# Altium PCB TESTER_SENSOR_HAL_AT24xx.PcbDoc
Units mm, origin at the board's own origin, x right, y up, seen from the top; angles counter-clockwise.
Board outline 104.78 x 105.66 mm, 2 copper layers (Top Layer, Bottom Layer); 66 components, 47 nets, 256 pads, 24 vias.
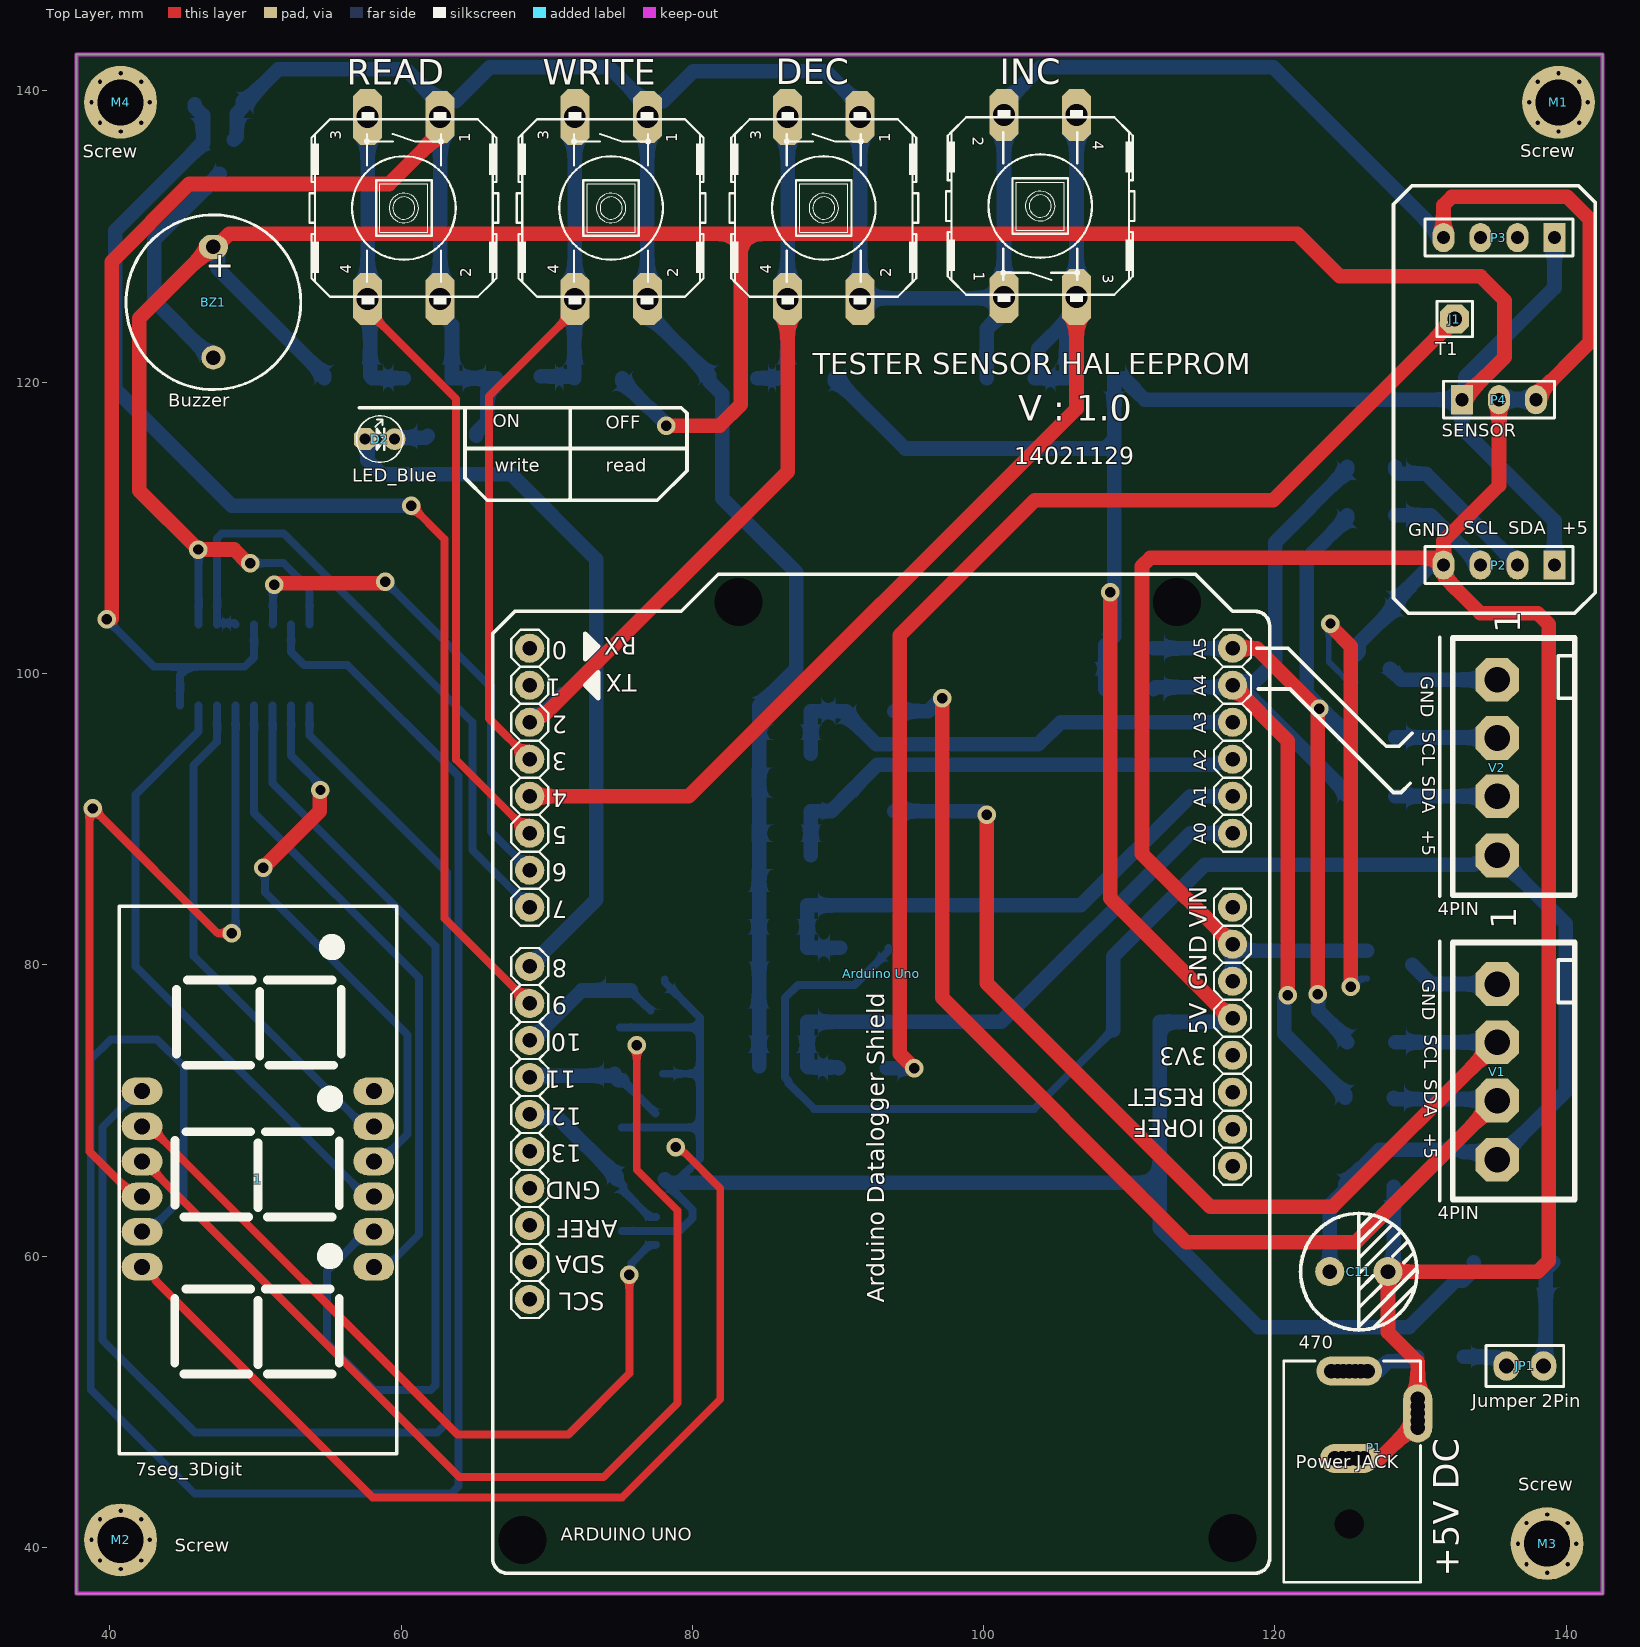
[diagram p0: Top Layer view]
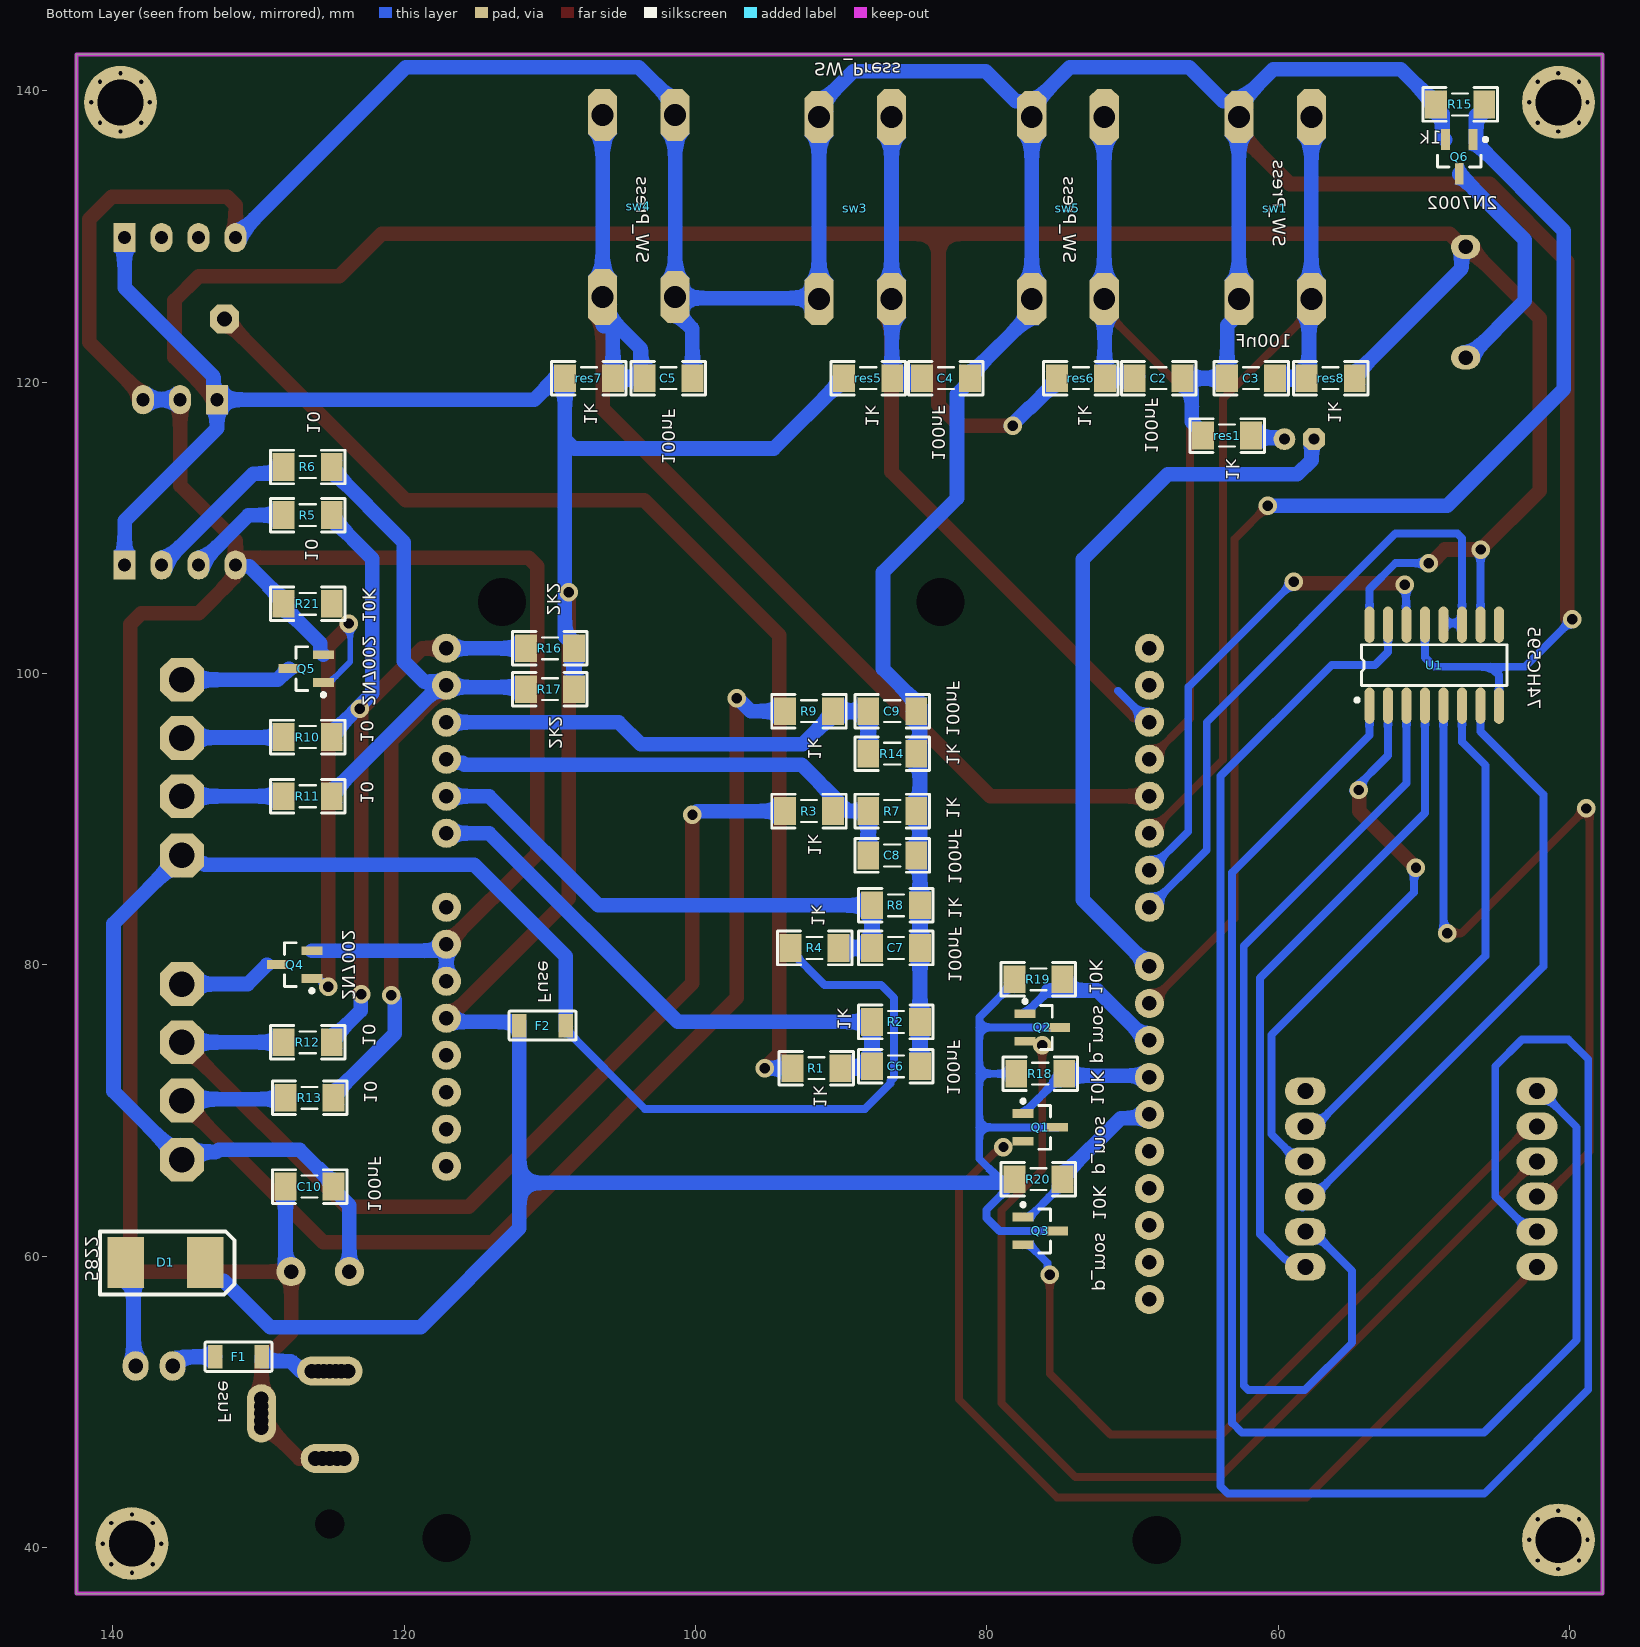
[diagram p1: Bottom Layer view, seen from below]
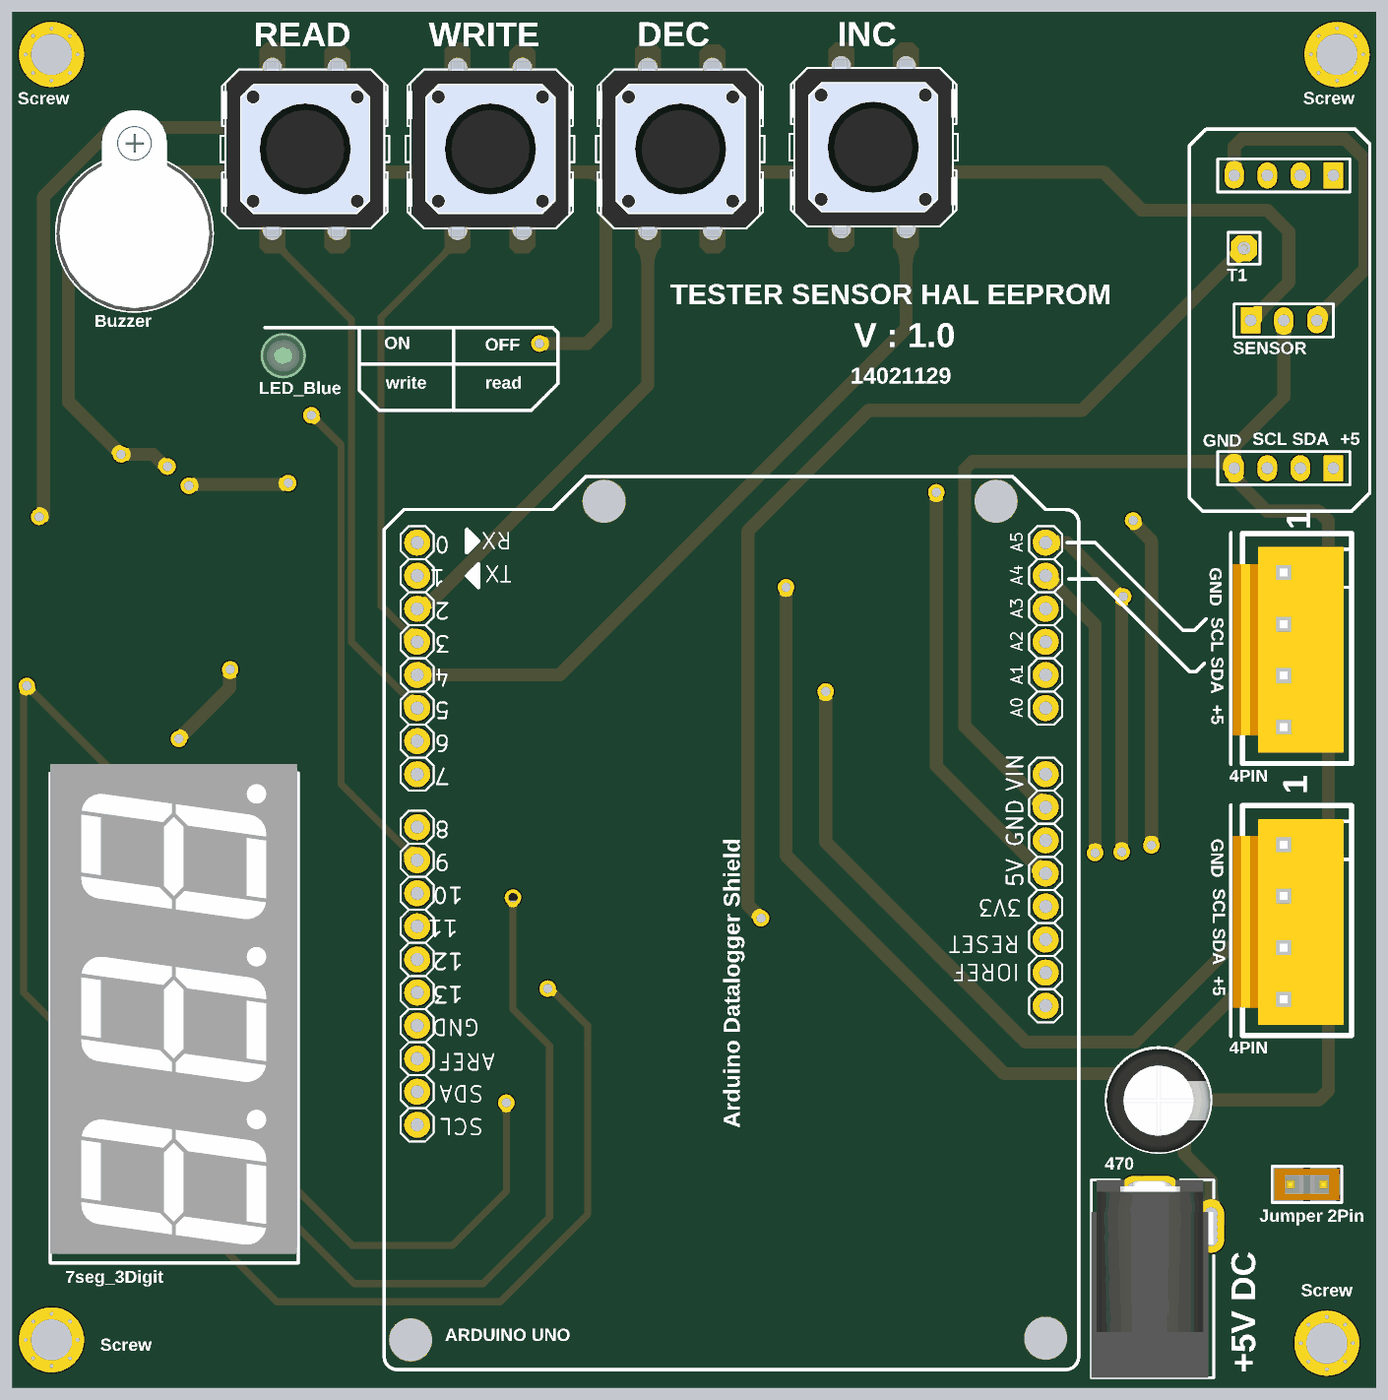
[diagram p2: 3D render of the assembled board from above, using the file's embedded part models]
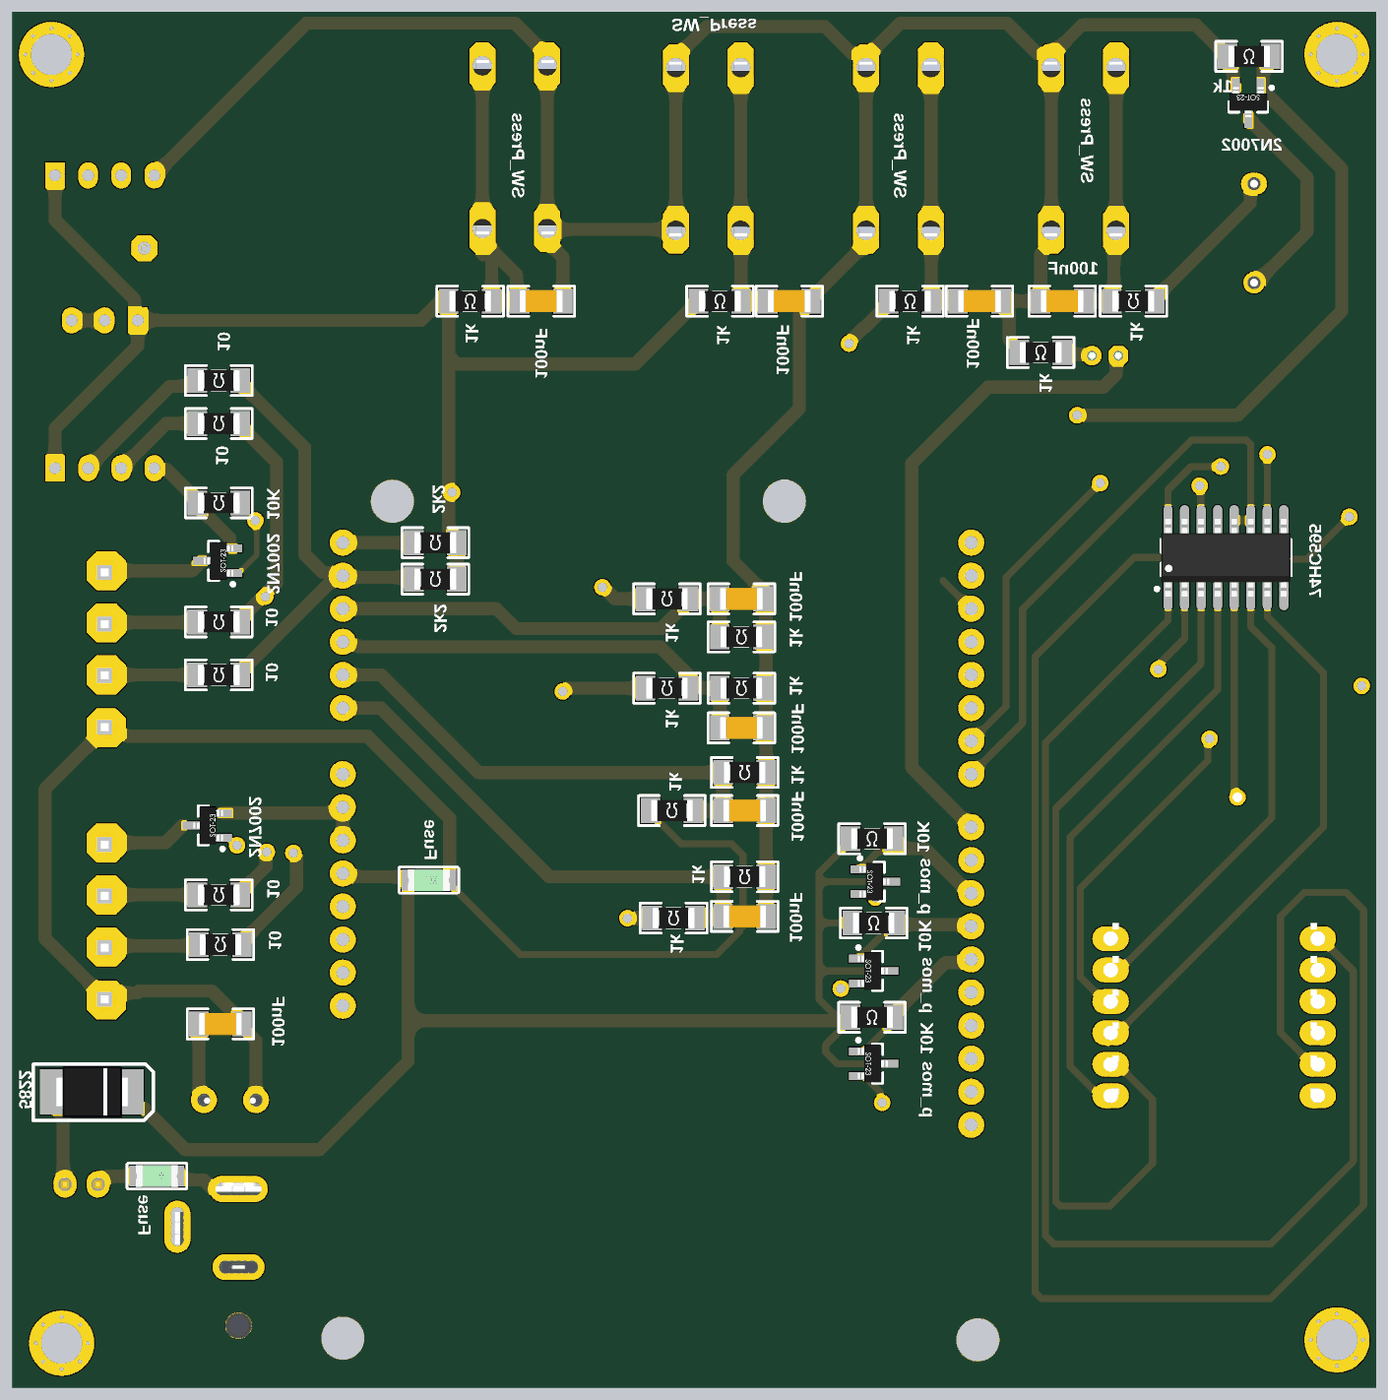
[diagram p3: 3D render of the assembled board from below, using the file's embedded part models]

## Layer stack, top to bottom
Top Solder: solder mask 0.0102, Solder Resist, Dk 3.5
Top Layer: signal copper 0.0356
Dielectric 1: dielectric 0.32, FR-4, Dk 4.8
Bottom Layer: signal copper 0.0356
Bottom Solder: solder mask 0.0102, Solder Resist, Dk 3.5

## Board outline
37.719,36.83 37.719,142.494 142.494,142.494 142.494,36.83

## Design rules (kind name [scope] priority, off if disabled: settings)
Clearance [All] p1: gap=0.254 ignorepadtopadclearanceinfootprint=FALSE except(0: Arc-Hole Track-Hole SMDPad-Hole THPad-Hole Via-Hole Fill-Hole Poly-Hole Region-Hole Text-Hole)
PolygonConnect [All] p1: connectstyle=Relief reliefconductorwidth=0.254 reliefentries=4 polygonreliefangle="90 Angle" airgapwidth=0.254
RoutingVias [All] p1: holewidth=0.711 width=1.27 viastyle="Through Hole" minholewidth=0.711 minwidth=1.27 maxholewidth=0.711 maxwidth=1.27
SolderMaskExpansion [All] p1: expansion=0.102 istentingtop=FALSE
Width [All] p1: maxlimit=2 minlimit=0.254 preferedwidth=0.54 minimp=50.000000 maximp=50.000000 favimp=50.000000
30 further rules are at their usual default settings.

## Components (designator, comment, footprint, x,y, rotation, side; value= is the part's Value field where it differs from the comment)
1 "7seg_3Digit" 7Segment 50.165,65.532 r90 top locked value="Anode Common"
"Arduino Uno" "ARDUINO UNO" "ARDUINO UNO" 93.094,74.287 r90 top locked
BZ1 "Buzzer" "Buzzer 3M" 47.117,125.486 r0 top value="5V 14V Current 30mA) ; RADIAL 12x10 mm"
C2 "100nF" CAP1206 68.199,120.269 r180 bottom value=100nf
C3 "100nF" CAP1206 61.849,120.269 r0 bottom value=100nf
C4 "100nF" CAP1206 82.804,120.269 r180 bottom value=100nf
C5 "100nF" CAP1206 101.854,120.269 r180 bottom value=100nf
C6 "100nF" CAP1206 86.233,73.025 r0 bottom value=100nf
C7 "100nF" CAP1206 86.233,81.153 r0 bottom value=100nf
C8 "100nF" CAP1206 86.487,87.503 r0 bottom value=100nf
C9 "100nF" CAP1206 86.487,97.409 r0 bottom value=100nf
C10 "100nF" CAP1206 126.492,64.77 r180 bottom value=100nf
C11 "470" CAP_POLAR_8X11.5 125.762,58.928 r0 top value=470UF/16V
D1 "5822" SMA_Diode 136.398,59.563 r0 bottom
D2 "LED_Blue" LED-3mm 58.547,116.083 r0 top
F1 "Fuse" "Fuse 1206 smd" 131.369,53.086 r90 bottom value="1A, 72V"
F2 "Fuse" "Fuse 1206 smd" 110.49,75.819 r90 bottom value="1A, 72V"
J1 "T1" PIN1 132.334,124.333 r0 top locked
JP1 "Jumper 2Pin" "Jumper Small - 2.54 - RED" 137.16,52.451 r180 top
M1 "Screw" "Board Screw_No Silk" 139.468,139.209 r0 top
M2 "Screw" "Board Screw_No Silk" 40.75,40.513 r0 top
M3 "Screw" "Board Screw_No Silk" 138.684,40.259 r0 top
M4 "Screw" "Board Screw_No Silk" 40.75,139.209 r0 top
P1 "Power JACK" "power jack" 125.103,37.601 r90 top
P2 "Header 4" HDR1X4 139.192,107.442 r180 top locked
P3 "Header 4" HDR1X4 139.192,129.921 r180 top locked
P4 "SENSOR" HDR1X3 132.842,118.793 r0 top locked
Q1 "p_mos" SOT23_BEC_M 76.327,68.834 r180 bottom
Q2 "p_mos" SOT23_BEC_M 76.2,75.692 r180 bottom
Q3 "p_mos" SOT23_BEC_M 76.327,61.722 r180 bottom
Q4 "2N7002" SOT23_BEC_M 127.508,80.01 r0 bottom
Q5 "2N7002" SOT23_BEC_M 126.714,100.33 r0 bottom
Q6 "2N7002" SOT23_BEC_M 47.559,135.477 r270 bottom
R1 "1k" RES1206 91.694,72.898 r0 bottom
R2 "1k" RES1206 86.233,76.073 r0 bottom
R3 "1k" RES1206 92.202,90.551 r0 bottom
R4 "1k" RES1206 91.821,81.153 r0 bottom
R5 "10" RES1206 126.619,110.871 r0 bottom value=1k
R6 "10" RES1206 126.619,114.173 r0 bottom value=1k
R7 "1k" RES1206 86.487,90.551 r0 bottom
R8 "1k" RES1206 86.233,84.074 r0 bottom
R9 "1k" RES1206 92.202,97.409 r0 bottom
R10 "10" RES1206 126.619,95.631 r0 bottom value=1k
R11 "10" RES1206 126.619,91.567 r0 bottom value=1k
R12 "10" RES1206 126.619,74.676 r0 bottom value=1k
R13 "10" RES1206 126.492,70.866 r0 bottom value=1k
R14 "1k" RES1206 86.487,94.488 r0 bottom
R15 "1k" RES1206 47.498,139.065 r180 bottom
R16 "2k2" RES1206 109.989,101.718 r0 bottom value=1k
R17 "2k2" RES1206 109.989,98.924 r0 bottom value=1k
R18 "10K" RES1206 76.327,72.517 r180 bottom value=1k
R19 "10K" RES1206 76.454,78.994 r180 bottom value=1k
R20 "10K" RES1206 76.454,65.278 r180 bottom value=1k
R21 "10K" RES1206 126.619,104.775 r0 bottom value=1k
res1 "1k" RES1206 63.5,116.332 r180 bottom
res5 "1k" RES1206 88.138,120.269 r180 bottom
res6 "1k" RES1206 73.533,120.269 r180 bottom
res7 "1k" RES1206 107.315,120.269 r180 bottom
res8 "1k" RES1206 56.388,120.269 r0 bottom
sw1 "SW_Press" tact_kfc-12x12 60.198,131.953 r270 bottom
sw3 "SW_Press" tact_kfc-12x12 89.027,131.953 r270 bottom
sw4 "SW_Press" tact_kfc-12x12 103.886,132.087 r90 bottom
sw5 "SW_Press" tact_kfc-12x12 74.422,131.953 r270 bottom
U1 "74HC595" SO16_N 49.276,100.571 r90 bottom value="max 6 V min 2 V ,8bit"
V1 "4PIN" 4PIN 135.255,78.676 r90 top value=Connector
V2 "4PIN" 4PIN 135.255,99.567 r90 top value=Connector

## Footprints (in the part's own frame and the unit in brackets; to place one, negate y for a bottom-side part, rotate by r counter-clockwise, add the part's x,y. Pads: shape width x height; smd on the part's side, far side on the other; paste and mask are expansions set on the pad)
4PIN [mil]
  oct 118x118 hole 69: 1(0,0) 2(-157.48,0) 3(-314.96,0) 4(-474.96,0)
  silkscreen extent -585,-210 115,155, body extent -550,-186 72,148, height 429
7Segment [mm]
  oval 1.9x2.8 hole 1.1: 1(-6.276,-7.965) 2(-3.863,-7.965) 3(-1.45,-7.965) 4(0.963,-7.965) 5(3.376,-7.965) 6(5.789,-7.965) 7(5.789,7.945) 8(3.376,7.945) 9(0.963,7.945) 10(-1.45,7.945) 11(-3.863,7.945) 12(-6.276,7.945)
  silkscreen extent -19.1,-9.54 18.49,9.51, body extent -18.42,-9.48 19.18,9.53, height 8.3
"ARDUINO UNO" [mm]
  round 2 hole 1: 0(27.44,24.26) 1(24.9,24.26) 2(22.36,24.26) 3(19.82,24.26) 3.3V(-0.5,-24) 4(17.28,24.26) 5(14.74,24.26) 5V(2.04,-24) 6(12.2,24.26) 7(9.66,24.26) 8(5.596,24.26) 9(3.056,24.26) 10(0.516,24.26) 11(-2.024,24.26) 12(-4.564,24.26) 13(-7.104,24.26) A0(14.74,-24) A1(17.28,-24) A2(19.82,-24) A3(22.36,-24) A4(24.9,-24) A5(27.44,-24) AREF(-12.184,24.26) GND1(7.12,-24) GND2(4.58,-24) GND3(-9.644,24.26) IOREF(-5.58,-24) NC(-8.12,-24) RST(-3.04,-24) SCL(-17.264,24.26) SDA(-14.724,24.26) Vin(9.66,-24)
  silkscreen extent -36.06,-26.54 32.52,26.8
"Board Screw_No Silk" [mm]
  round 0.6 hole 0.3: S(-2,0) S(-1.414,-1.414) S(-1.414,1.414) S(0,-2) S(0,2) S(1.414,-1.414) S(1.414,1.414) S(2,0)
  round 5 hole 3.15 mask+0.1: S(0,0)
"Buzzer 3M" [mm]
  oval 2x1.65 hole 1 mask+0.102: 1(0,3.8)
  round 1.65 / inner oval 2x1.65 / far side oval 2x1.65 hole 1 mask+0.102: 2(0,-3.8)
  silkscreen extent -6,-6 6,6, body extent -6,-6 6,9.45, height 9.65
CAP1206 [mm]
  rect 1.5x1.9 smd: 1(-1.651,0) 2(1.651,0)
  Top Layer pour cut-out: 1.136,1.515 1.136,-1.533 -1.15,-1.533 -1.15,1.515
  silkscreen extent -2.56,-1.15 2.56,1.15, body extent -1.65,-0.85 1.65,0.85, height 0.94
CAP_POLAR_8X11.5 [mm]
  round 2 hole 1 mask+0.102: 1(-2,0) 2(2,0)
  silkscreen extent -4,-4 4,4, body extent -4,-4.05 4,3.95, height 11.5
"Fuse 1206 smd" [mm]
  rect 1.6x1 smd: 1(0,-1.6) 2(0,1.6)
  silkscreen extent -1,-2.3 1,2.3, body extent -0.83,-1.6 0.83,1.6, height 0.56
HDR1X3 [mm] "Connector; Header; 3 Position"
  rect 1.5x2 hole 0.9: 1(0,0)
  oval 1.5x2 hole 0.9: 2(2.54,0) 3(5.08,0)
  silkscreen extent -1.27,-1.27 6.35,1.27
HDR1X4 [mm] "Connector; Header; 4 Position"
  rect 1.5x2 hole 0.9: 1(0,0)
  oval 1.5x2 hole 0.9: 2(2.54,0) 3(5.08,0) 4(7.62,0)
  silkscreen extent -1.27,-1.27 8.89,1.27
"Jumper Small - 2.54 - RED" [mil] "Designer Abbas Basereh"
  oval 70x80 hole 40: 1(-50,0) 2(50,0)
  silkscreen extent -105,-55 105,55, body extent -100,-50 100,50, height 337
LED-3mm [mm]
  oct 1.5x1.5 hole 0.762 mask+0.102: 1(-1.016,0)
  round 1.5 hole 0.762 mask+0.102: 2(1.016,0)
  silkscreen extent -1.6,-1.6 1.6,1.6, body extent -1.75,-1.75 1.75,1.75, height 3.9
PIN1 [mm] "Connector; Plug"
  oct 2x2 hole 1: 1(0,0)
  silkscreen extent -1.22,-1.22 1.22,1.22
"power jack" [mm] "Power Adaptor Jack"
  round 1.5 hole 1: 1(14.5,-1.25) 1(14.5,-0.8) 1(14.5,-0.4) 1(14.5,0.4) 1(14.5,0.8) 1(14.5,1.25) 2(8.5,-1) 2(8.5,1) 2(8.5,-0.5) 2(8.5,0.5) 3(10.6,-4.7) 3(11.1,-4.7) 3(12.1,-4.7) 3(12.6,-4.7)
  oval 2x4.5 hole 1: 1(14.5,0)
  oval 2x4 hole 1: 2(8.5,0)
  oval 4x2 hole 1: 3(11.6,-4.7)
  round 1.9 hole 2: MH(4,0)
  silkscreen extent 0,-4.9 15.2,4.5, body extent 0,-4.9 15.2,4.5, height 11
RES1206 [mm]
  rect 1.5x1.9 smd: 1(-1.651,0) 2(1.651,0)
  Top Layer pour cut-out: 1.136,1.515 1.136,-1.533 -1.15,-1.533 -1.15,1.515
  silkscreen extent -2.56,-1.15 2.56,1.15, body extent -1.6,-0.8 1.6,0.8, height 0.62
SMA_Diode [mm]
  rect 2.5x3.5 smd: 1(2.7,0) 2(-2.75,0)
  silkscreen extent -4.75,-2.12 4.47,2.2, body extent -2.85,-1.95 2.74,1.99, height 2.44
SO16_N [mm] "16-Pin Small Outline Integrated Circuit 1.27 mm Pitch, IPC Medium Density - DESIGNER ABBAS BASEREH"
  oval 2.5x0.7 smd: 1(-2.781,4.445) 2(-2.781,3.175) 3(-2.781,1.905) 4(-2.781,0.635) 5(-2.781,-0.635) 6(-2.781,-1.905) 7(-2.781,-3.175) 8(-2.781,-4.445) 9(2.781,-4.445) 10(2.781,-3.175) 11(2.781,-1.905) 12(2.781,-0.635) 13(2.781,0.635) 14(2.781,1.905) 15(2.781,3.175) 16(2.781,4.445)
  silkscreen extent -2.52,-5 1.4,5.42, body extent -3,-4.97 3,4.96, height 1.62
SOT23_BEC_M [mm] "SOT23, 3-Leads, Body 2.9x1.3mm, Pitch 0.95mm, Lead Span 2.4mm, IPC Low Density"
  rect 1.45x0.6 smd: 1(-1.175,0.95) 2(-1.175,-0.95) 3(1.175,0)
  silkscreen extent -1.3,-1.5 0.7,1.92, body extent -1.23,-1.45 1.07,1.45, height 1
tact_kfc-12x12 [mm]
  oct 3.582x2 hole 1.5 mask+0.102: 1(-6.248,-2.489) 1(6.248,-2.489) 2(6.248,2.489)
  oct 3.85x2 hole 1.5 mask+0.102: 2(-6.248,2.489)
  body extent -6.72,-6.03 6.73,5.97, height 17.7

## Part data
1: library part 7Segment-3Digit, "7Segment-3 Digit- Anode Common", manufacture=China, manufacture p-n=7Segment, Footprint Patch=R_C_D_T.PcbLib, LIBRARY PATCH=R_C_D_T.SchLib, part=7Segment-3Digit, Rahkaran=1012400449, supplier1=javan, supplier1 p-n=7Segment-3Digit
BZ1: library part "BUZZER 5V", case=Cylindrical, manufacture="BUZZER 12A05", power=CHINA, Footprint Patch=NKH_Contacts.PcbLib, LIBRARY PATCH=NKH_Contacts.SchLib, manufacture p-n="BUZZER 12A05", part="BUZZER 5V", Rahkaran=1011600143, supplier1=javan, supplier1 p-n="BUZZER 12A05"
C2 C3 C4 C5 C6 C7 C8 C9 C10: library part Cap-smd-1206-100nf, "cap_no_polar_seramic_multilayer", case=1206, manufacture="Chaozhou Three-circle (Group) Co", manufacture p-n=TCC1206X7R104K500DT, Footprint Patch=R_C_D_T.PcbLib, LIBRARY PATCH=R_C_D_T.SchLib, part=Cap-smd-1206-100nf, Rahkaran=1010600301, supplier1=javan, supplier1 p-n="100NF (1206) 50V 10% X7R"
C11: library part Cap-pol-dip-470uf_16V, "Cap electrolitic radial", manufacture="Jiaweicheng Elctronic Co", manufacture p-n=KM471M1CBKJ0812VBK, designer=rashid_behdarvand, Footprint Patch=R_C_D_T.PcbLib, LIBRARY PATCH=R_C_D_T.SchLib, part=Cap-pol-dip-470uf_16V, Rahkaran=‎1010600330, supplier1=javan, supplier1 p-n=470UF/16V-8X12-105C-BLACK
D1: library part Diode-shotkey-SMB5822, manufacture=Toshiba, manufacture p-n="1N5822 SMD SS34", Footprint Patch=R_C_D_T.PcbLib, LIBRARY PATCH=R_C_D_T.SchLib, part=Diode-shotkey-SMB5822, Rahkaran=‎1010700945, supplier1=kalaelec, supplier1 p-n="1N5822 SMD SS34"
D2: library part LED3MM_RED, "LED LIGHTING 5mm Blue", manufacture=China, manufacture p-n="LED 3mm", Data=16-12-2016, designer="Abbas Basereh", Footprint Patch=R_C_D_T.PcbLib, LIBRARY PATCH=R_C_D_T.SchLib, part=LED3MM_RED, Rahkaran=‎1010000820, supplier1=javan, supplier1 p-n="LED 3mm R"
F1 F2: library part "Fuse 1206 smd", case=1206, manufacture="Reomax Electronics", manufacture p-n=12.100.1, Footprint Patch=R_C_D_T.PcbLib, LIBRARY PATCH=R_C_D_T.SchLib, part="Fuse 1206 smd", Rahkaran=1011500951, supplier1=javan, supplier1 p-n="FUSE 1A SMD (1206) ONE TIME"
J1: library part Socket, "Socket", Footprint Patch=NKH_Contacts.PcbLib, LatestRevisionDate=17-Jul-2002, LatestRevisionNote="Re-released for DXP Platform.", LIBRARY PATCH=NKH_Contacts.SchLib, part=Socket, Publisher="Altium Limited", supplier1=javan
JP1: "Jumper, 2-Pin", Data=16-12-2016, designer="Abbas Basereh", Footprint Patch=NKH_Contacts.PcbLib, manufacture p-n="Jumper 2Pin", part="Jumper 2Pin", supplier1 p-n="Jumper 2Pin"
M1 M2 M3 M4: library part "Board Screw", "Board Screw With Spacer"
P1: library part "dc jack adaptor", case=9*11*13, manufacture p-n=CHINA, Footprint Patch=NKH_Contacts.PcbLib, LIBRARY PATCH=NKH_Contacts.SchLib, part="dc jack adaptor", Rahkaran=1011100270, supplier1=javan, supplier1 p-n="DC PLUG 5.5MM PCB"
P2 P3: "Header, 4-Pin", LatestRevisionDate=17-Jul-2002, LatestRevisionNote="Re-released for DXP Platform.", Publisher="Altium Limited"
P4: library part "Header 3", "Header, 3-Pin", LatestRevisionDate=17-Jul-2002, LatestRevisionNote="Re-released for DXP Platform.", Publisher="Altium Limited"
Q1 Q2 Q3: library part Mosfet-p-channel-AO3401, "P CHANNEL MOSFET", Current - Continuous Drain (Id) @ 25° C=4.2A, Input Capacitance (Ciss) @ Vds="727pF @ 20V", manufacture="Alpha & Omega Semiconductor", manufacture p-n=AO3401A, Manufacturer="Diodes Inc", Package / Case=SOT-23, Supplier Part Number=DMP2305UDITR-ND, Category="Discrete Semiconductor Products", datasheet link=a03401_data_sheet, Footprint Patch=R_C_D_T.PcbLib, LIBRARY PATCH=R_C_D_T.SchLib, Mounting Type="Surface Mount", part=Mosfet-p-channel-AO3401, Rahkaran=‎1010300772, supplier1=javan, supplier1 p-n=AO3401A, Supplier 1=Digi-Key, Supplier Part Number 1=DMP2305UDITR-ND
Q4 Q5 Q6: library part Mosfet-n-channel-2n7002, manufacture="Toshiba Corporation", manufacture p-n=T2N7002AK,LM, Footprint Patch=R_C_D_T.PcbLib, LIBRARY PATCH=R_C_D_T.SchLib, part=Mosfet-n-channel-2n7002, Rahkaran=‎1010301739, supplier1=javan, supplier1 p-n=2N7002A
R1 R2 R3 R4 R5 R6 R7 R8 R9 R10 R11 R12 R13 R14 R15 R16 R17 R18 R19 R20 R21 res1 res5 res6 res7 res8: library part resistor-smd-1206-1k, case=1206, manufacture="ANHUI VICO TECHNOLOGIES CO.", manufacture p-n="1K (1206) 1%", designer=rashid_behdarvand, Footprint Patch=R_C_D_T.PcbLib, LIBRARY PATCH=R_C_D_T.SchLib, part=resistor-smd-1206-1k, Rahkaran=1012000595, supplier1=javan, supplier1 p-n="1K (1206) 1%"
sw1 sw3 sw4 sw5: library part "tac switch kfc-12x12x12", "small tac switch", case=kfc-12x12, manufacture p-n=CHINA, Footprint Patch=NKH_Contacts.PcbLib, LIBRARY PATCH=NKH_Contacts.SchLib, part="tac switch kfc-12x12x12", Rahkaran=1011800267, supplier1=javan, supplier1 p-n=KFC-12X12X12
U1: library part "74HC595 SMD", "8 Bit Shift Register with Output Latches (3 STATE)", case=SO-16, manufacture="Nexperia USA Inc", manufacture p-n=74HC595D, Code_IPC=SOIC127P600-16, ComponentLink1Description="Manufacturer Link", ComponentLink1URL=http://www.st.com/, ComponentLink2Description=Datasheet, ComponentLink2URL=http://www.st.com/stonline/products/literature/ds/1989/m74hc595.pdf, DatasheetVersion=Apr-1993, Footprint Patch=NKH_IC.PcbLib, LatestRevisionDate=13-Apr-2006, LatestRevisionNote="IPC-7351 Footprint Added.", LIBRARY PATCH=NKH_IC.SchLib, PackageDescription="16-Pin Small Outline Integrated Circuit 1.27 mm Pitch", PackageReference=SO16, PackageVersion=May-1998, part="74HC595 SMD", Published=8-Jun-2000, Publisher="Altium Limited", Rahkaran=‎1012300064, supplier1=javan, supplier1 p-n=74HC595D
V1 V2: library part VH_ST_4pin, "connector power 4pin stright lock", Footprint Patch=NKH_Contacts.PcbLib, LIBRARY PATCH=NKH_Contacts.SchLib, part=VH_ST_4pin, Rahkaran=1011100529

## Free pads (board coordinates)
  round 1.524 hole 3.3: 9(113.284,104.902) 10(83.185,104.902) 11(68.326,40.513) 12(117.094,40.64)

## Via types
v1: diameter 1.27, hole 0.711, Top Layer to Bottom Layer, 23 vias
v2: diameter 0.8, hole 0.5, Top Layer to Bottom Layer, tented both sides, 1 vias

## Nets (pads, with @x,y where several pads share a name; then routed paths per layer and width w, separated by ;. In a path a pad name is that pad's centre, name@x,y a point inside that pad or via, vN(x,y) a via of type N, cw(c..) or ccw(c..) an arc to the next point about the centre after c; other vN are vias at no path point)
+5: "Arduino Uno.5V" BZ1.1 D1.2 F2.2 P2.1 P3.1 P4.1 Q1.3 Q2.3 Q3.3 R16.1 R17.1 R18.1 R19.1 R20.1 res5.1 res6.1 res7.1 res8.1 U1.10 U1.16 | length 419.1
  Top Layer w0.54: v1@46.319,108.367 v1@46.319,108.402 ; BZ1.1@46.942,129.286 BZ1.1 ; v1@49.488,107.569 v1(49.657,107.569) ; P3.1 P3.1@139.192,130.171
  Top Layer w1: v1(46.087,108.506) 42.037,112.556 42.037,124.381 BZ1.1@46.942,129.286 ; v1@46.424,108.506 48.551,108.506 v1@49.488,107.569 ; BZ1.1 47.314,129.286 48.203,130.175 83.312,130.175 ; v1(78.218,117.015) 81.867,117.015 83.312,118.461 83.312,130.175 ; v1(108.698,105.585) 108.698,84.571 116.941,76.327 117.094,76.327 ; P4.1 132.842,119.043 133.092,119.292 133.342,119.292 135.763,121.714 135.763,125.603 134.112,127.254 124.46,127.254 121.539,130.175 83.312,130.175
  Bottom Layer w0.54: U1.10 v1@46.101,108.077 ; v1(49.657,107.569) 51.943,107.569 53.721,105.791 U1.16 ; Q2.3 80.518,75.692 ; Q3.3 79.121,61.722 80.01,62.611 80.01,63.173 78.105,65.078 R20.1@78.105,65.274 ; Q1.3 80.518,68.834 ; R18.1 80.518,72.517 ; R19.1 78.105,78.794 80.518,76.381 80.518,75.692 ; 78.867,65.024 80.518,66.675 80.518,68.834 ; 112.065,68.834 112.09,68.86 ; 80.518,68.834 80.518,72.517 ; 80.518,72.517 80.518,75.692
  Bottom Layer w1: BZ1.1 47.416,128.987 47.416,127.79 54.737,120.469 res8.1 ; res6.1 75.184,120.069 77.016,118.237 77.089,118.237 v1@78.359,116.967 ; R20.1 78.105,65.274 78.355,65.024 78.867,65.024 112.09,65.024 ; res5.1 89.789,120.069 90.039,119.819 90.239,119.819 94.615,115.443 108.331,115.443 108.966,116.078 ; R17.1 R16.1 108.338,101.918 108.966,102.546 108.966,116.078 ; res7.1 108.966,116.078 ; res7.1@109.601,120.269 111.078,118.793 P4.1 ; 117.094,76.327 116.845,76.078 112.09,76.078 F2.2 112.09,68.86 112.09,65.024 ; D1.2 133.648,59.063 132.898,58.313 132.398,58.313 129.203,55.118 118.872,55.118 112.09,61.9 112.09,65.024 ; P2.1 139.192,110.49 132.842,116.84 P4.1 ; P3.1 139.192,126.492 133.092,120.392 133.092,119.043 P4.1
A0: "Arduino Uno.A0" C6.2 R1.1 R2.2 | length 39.8
  Bottom Layer w1: R1.1 89.98,72.962 87.947,72.962 C6.2 R2.2 101.219,76.073 114.173,89.027 117.094,89.027
A1: "Arduino Uno.A1" C7.2 R4.1 R8.2 | length 37.5
  Bottom Layer w1: R4.1 C7.2 R8.2 106.68,84.074 114.173,91.567 117.094,91.567
A2: "Arduino Uno.A2" C8.2 R3.1 R7.2 | length 33.5
  Bottom Layer w1: C8.2 R7.2 89.535,90.551 90.143,91.159 92.71,93.726 115.858,93.726 115.99,93.858 116.845,93.858 117.094,94.107
A3: "Arduino Uno.A3" C9.2 R9.1 R14.2 | length 33.6
  Bottom Layer w1: R14.2 C9.2 R9.1 90.551,97.209 92.637,95.123 103.759,95.123 105.283,96.647 117.094,96.647
A4: "Arduino Uno.A4" R6.1 R11.1 R13.1 R17.2 | length 66.6
  Top Layer w1: 117.094,99.187 120.89,95.391 v1(120.89,77.899)
  Bottom Layer w1: R17.2 111.771,99.056 116.963,99.056 117.094,99.187 117.343,98.938 117.797,98.938 124.968,91.767 R11.1 ; 117.797,99.426 118.603,99.426 120.015,100.838 120.015,109.02 124.968,113.973 R6.1 ; v1@120.774,77.838 120.838,77.775 120.65,77.587 120.65,75.257 124.841,71.066 R13.1
A5: "Arduino Uno.A5" R5.1 R10.1 R12.1 R16.2 | length 54.3
  Top Layer w1: 117.094,101.727 118.745,101.727 122.836,97.636 122.924,97.636 122.936,97.624 v1(122.936,77.978)
  Bottom Layer w1: R16.2 111.644,101.723 117.09,101.723 117.094,101.727 ; v1(122.936,77.978) 122.988,77.926 122.988,76.856 124.718,75.126 124.718,74.926 R12.1 ; R10.1 124.968,95.831 122.174,98.625 122.174,107.877 124.968,110.671 R5.1
  other v1: 123.049,97.584
ADC1: C10.2 C11.1 F2.1 R4.2 V1.4 V2.4 | length 117.1
  Bottom Layer w0.54: R4.2 93.472,80.953 91.132,78.613 87.249,78.613 86.36,77.724 86.36,72.263 86.61,72.013 86.61,71.858 88.364,70.104 103.475,70.104 F2.1@108.89,75.519
  Bottom Layer w1: F2.1@108.89,75.519 F2.1 108.89,80.569 115.189,86.868 133.671,86.868 133.763,86.961 134.713,86.961 V2.4 139.954,82.804 139.954,71.311 V1.4 134.713,67.154 132.871,67.154 132.715,67.31 127.181,67.31 124.841,64.97 C10.2 124.841,64.57 123.762,63.491 C11.1
ADC2: R3.2 R12.2 V1.2 | length 71.1
  Top Layer w1: v1(100.203,90.297) 100.203,78.74 115.57,63.373 123.952,63.373 V1.2
  Bottom Layer w1: R3.2 99.876,90.551 100.13,90.297 v1(100.203,90.297) ; R12.2 V1.2
ADC3: R9.2 R13.2 V1.3 | length 80.4
  Top Layer w1: v1@97.155,98.211 97.155,77.724 113.919,60.96 125.539,60.96 V1.3
  Bottom Layer w1: R9.2 96.193,97.409 97.082,98.298 v1(97.155,98.298) ; R13.2 128.238,70.771 135.16,70.771 V1.3
D2: "Arduino Uno.2" C4.1 res5.2 sw3.2 | length 59.7
  Top Layer w1: 68.834,96.647 69.105,96.647 69.605,97.147 69.842,97.147 86.538,113.843 sw3.2@86.538,125.705
  Bottom Layer w0.54: 68.834,96.647 70.993,98.806
  Bottom Layer w1: C4.1 res5.2 86.512,120.294 86.512,125.679 86.538,125.705 sw3.2@86.538,138.201
D3: "Arduino Uno.3" C2.1 res6.2 sw5.2 | length 55.4
  Top Layer w0.54: 68.834,94.107 66.04,96.901 66.04,119.021 71.933,124.914 sw5.2@71.933,125.705
  Bottom Layer w1: C2.1@69.596,120.396 res6.2@71.882,120.396 ; res6.2 71.907,120.294 71.907,125.679 71.933,125.705 sw5.2@71.933,138.201
D4: "Arduino Uno.4" C5.1 res7.2 sw4.2 | length 81.5
  Top Layer w1: 68.834,91.567 79.756,91.567 106.375,118.186 sw4.2@106.375,125.839
  Bottom Layer w1: 105.664,123.825 res7.2 C5.1 103.755,120.519 103.755,122.294 sw4.2@105.793,124.331 ; 106.299,123.825 106.375,123.901 106.375,125.839 sw4.2@106.375,138.336
D5: "Arduino Uno.5" C3.1 res8.2 sw1.2 | length 61.5
  Top Layer w0.54: sw1.2@57.709,125.705 57.709,124.917 63.786,118.84 63.786,94.075 68.834,89.027
  Bottom Layer w1: sw1.2@57.709,138.201 57.709,125.705 57.874,125.539 57.874,120.434 res8.2 C3.1
D6: "Arduino Uno.6" U1.14 | length 34.2
  Top Layer w0.54: v1(51.294,106.093) v1@51.396,106.196 ; v1@58.825,106.196 v1(58.928,106.299)
  Top Layer w1: v1@51.396,106.196 v1@58.825,106.196
  Bottom Layer w0.54: U1.14 51.212,103.383 51.212,105.887 v1@51.181,105.918 ; v1(58.928,106.299) 66.167,99.06 66.167,89.154 68.834,86.487
D7: "Arduino Uno.7" U1.11 U1.12 | length 44.6
  Bottom Layer w0.54: U1.11 U1.11@47.371,103.378 ; U1.12 48.641,103.378 48.567,103.452 47.445,103.452 U1.11@47.371,103.378 ; 68.834,83.947 64.897,87.884 64.897,96.647 51.943,109.601 47.687,109.601 47.371,109.285 U1.11@47.371,103.378
D8: "Arduino Uno.8" D2.1 | length 49.9
  Bottom Layer w1: D2.1 57.699,115.915 57.699,114.64 58.674,113.665 67.564,113.665 73.406,107.823 73.406,84.455 68.834,79.883
D9: "Arduino Uno.9" Q6.1 R15.2 | length 83.4
  Top Layer w0.54: v1(60.706,111.506) 62.992,109.22 62.992,83.185 68.834,77.343
  Bottom Layer w1: R15.2 45.847,138.865 46.409,138.303 46.409,136.427 40.386,130.404 40.386,119.507 48.387,111.506 v1(60.706,111.506)
D10: "Arduino Uno.10" Q2.1 R19.2 | length 10.3
  Bottom Layer w0.54: 75.76,78.232 Q2.1@77.15,76.842
  Bottom Layer w1: 68.834,74.803 68.987,74.803 72.416,78.232 74.803,78.232 75.76,78.232
D11: "Arduino Uno.11" Q1.1 R18.2 | length 10
  Bottom Layer w0.54: R18.2@75.194,72.067 Q1.1@77.477,69.784
  Bottom Layer w1: 68.834,72.263 68.961,72.39 74.549,72.39 R18.2 74.676,72.317 74.926,72.067 R18.2@75.194,72.067
D12: "Arduino Uno.12" Q3.1 R20.2 | length 11.9
  Bottom Layer w0.54: R20.2 75.283,64.798 75.283,64.466 77.077,62.672 Q3.1
  Bottom Layer w1: 68.834,69.723 69.083,69.474 70.807,69.474 74.803,65.478 R20.2
D13: "Arduino Uno.13"
GND: "Arduino Uno.GND1" "Arduino Uno.GND2" C2.2 C3.2 C4.2 C5.2 C6.1 C7.1 C8.1 C9.1 C10.1 C11.2 P1.2 P1.3 P2.4 P3.4 P4.2 P4.3 Q4.2 Q5.2 Q6.2 R2.1 R7.1 R8.1 R14.1 R15.1 R21.2 res1.1 sw1.1 sw3.1 sw4.1 sw5.1 U1.8 U1.13 | length 498.2
  Top Layer w1: v1@40.132,103.759 40.132,128.27 45.466,133.604 59.182,133.604 62.187,136.609 62.187,136.703 62.687,137.203 sw1.1@62.687,138.201 ; 117.094,81.407 110.871,87.63 110.871,107.364 111.457,107.95 131.064,107.95 131.226,107.788 131.341,107.788 131.572,107.557 P2.4 ; P1.2@124.603,46.101 125.603,46.101 127.203,46.101 129.803,48.701 129.803,49.201 129.803,49.701 129.803,50.201 129.803,52.726 127.762,54.767 C11.2 138.049,58.928 138.811,59.69 138.811,103.378 138.049,104.14 134.112,104.14 131.668,106.584 131.668,107.346 P2.4 ; P3.4@131.572,129.671 P3.4 131.572,132.129 132.158,132.715 140.081,132.715 141.605,131.191 141.605,122.726 137.922,119.043 P4.3 ; P4.2 135.382,112.903 131.572,109.093 P2.4
  Bottom Layer w0.54: v1@39.878,103.632 39.906,103.66 39.938,103.66 39.938,103.567 43.048,100.457 45.401,100.457 ; U1.8 44.831,99.887 45.401,100.457 ; U1.13 49.911,101.092 49.276,100.457 45.401,100.457
  Bottom Layer w1: Q6.2 48.709,136.852 48.709,138.425 49.149,138.865 R15.1 49.149,139.265 49.399,139.515 49.599,139.515 51.562,141.478 60.325,141.478 62.687,139.116 sw1.1@62.687,138.785 ; res1.1 65.151,116.532 65.913,117.294 65.913,119.434 66.548,120.069 C2.2 C3.2 63.5,123.894 62.687,124.707 62.687,125.705 62.687,138.201 sw1.1@62.687,138.785 ; C6.1 R2.1 C7.1 R8.1 84.582,97.79 87.122,100.33 87.122,106.934 82.042,112.014 82.042,119.18 81.153,120.069 C4.2 81.153,120.469 76.911,124.711 76.911,125.705 76.911,138.201 sw5.1@76.911,138.785 ; C5.2 100.203,123.647 101.397,124.841 sw4.1@101.397,125.839 ; 117.094,78.867 117.094,81.407 117.446,81.407 117.893,80.96 Q4.2 ; Q5.2 125.564,101.28 125.764,101.48 125.764,102.069 128.27,104.575 R21.2 128.27,104.975 130.641,107.346 131.476,107.346 P2.4 ; C11.2 127.762,59.199 128.143,59.58 C10.1 ; P3.4 131.572,130.036 131.187,130.421 131.072,130.421 119.88,141.613 103.883,141.613 101.397,139.126 101.397,138.336 sw4.1@101.397,125.839 ; P4.2 P4.3 ; sw1.1@62.687,138.785 63.187,139.285 63.771,139.285 66.099,141.613 74.29,141.613 76.911,138.992 sw5.1@76.911,138.785 ; sw5.1@76.911,138.785 77.411,139.285 77.995,139.285 80.061,141.351 89.157,141.351 91.516,138.992 91.516,138.201 91.516,125.705 91.583,125.772 101.33,125.772 sw4.1@101.397,125.839
  other v1: 39.797,103.708
Net1_1: 1.1 U1.4 | length 45
  Bottom Layer w0.54: U1.4 49.911,90.424 61.245,79.09 61.245,61.499 59.496,59.75 59.441,59.75 59.108,59.417 1.1@58.052,59.417
Net1_2: 1.2 U1.3 | length 69.6
  Bottom Layer w0.54: U1.3 51.181,92.456 62.357,81.28 62.357,51.116 62.041,50.8 58.166,50.8 54.912,54.054 54.912,58.976 57.658,61.722 1.2@58.178,61.722
Net1_3: 1.3 U1.7 | length 43.1
  Bottom Layer w0.54: U1.7 46.101,96.012 41.783,91.694 41.783,79.883 1.3@58.325,63.341
Net1_4: 1.4 U1.2 | length 38.9
  Top Layer w1: v1(50.532,86.662) 54.421,90.551 54.421,91.948 v1(54.469,91.996)
  Bottom Layer w0.54: v1@50.673,86.79 50.673,84.963 60.451,75.185 60.451,68.366 58.775,66.69 1.4@58.775,66.395 ; U1.2 52.451,94.361 v1@54.864,91.948
Net1_5: 1.5 U1.6 | length 35.1
  Bottom Layer w0.54: U1.6 47.371,95.304 45.756,93.69 45.756,80.609 1.5@57.924,68.441
Net1_7: 1.7 U1.1 | length 98.3
  Bottom Layer w0.54: 1.7@42.291,71.628 39.497,68.834 39.497,54.238 45.856,47.879 62.484,47.879 63.151,48.546 63.151,86.328 53.721,95.758 U1.1
Net1_8: 1.8 Q3.2 | length 53.8
  Top Layer w0.54: 1.8 42.725,68.908 63.881,47.752 71.501,47.752 75.678,51.929 v1(75.678,58.722)
  Bottom Layer w0.54: v1(75.678,58.722) 75.817,58.862 75.817,59.512 77.077,60.772 Q3.2
Net1_9: 1.9 Q2.2 | length 73.8
  Top Layer w0.54: 1.9@42.072,66.767 64.008,44.831 73.914,44.831 78.994,49.911 78.994,63.119 76.186,65.927 v1(76.186,74.47)
Net1_10: 1.10 U1.5 | length 57.2
  Top Layer w0.54: v1@38.608,90.551 38.608,67.183 1.10@42.153,63.638 ; v1(38.848,90.726) 47.405,82.169 v1(48.387,82.169)
  Bottom Layer w0.54: v1(48.387,82.169) 48.387,82.367 48.641,82.621 U1.5
Net1_11: 1.11 U1.15 | length 137.3
  Bottom Layer w0.54: 1.11 42.67,61.669 45.085,64.084 45.085,73.025 43.244,74.866 40.068,74.866 38.703,73.501 38.703,50.832 45.847,43.688 63.438,43.688 63.945,44.195 63.945,92.954 56.315,100.584 53.34,100.584 52.451,101.473 U1.15
Net1_12: 1.12 Q1.2 | length 68.1
  Top Layer w0.54: 1.12@41.995,59.481 42.077,59.481 43.149,58.409 43.149,58.327 58.042,43.434 75.184,43.434 81.915,50.165 81.915,64.643 79.438,67.12 79.415,67.12 79.05,67.485 v1(78.853,67.485)
NetBZ1_2: BZ1.2 Q6.3 | length 16.3
  Bottom Layer w1: BZ1.2 46.942,121.686 43.053,125.575 43.053,129.771 47.559,134.277 Q6.3
NetD1_1: D1.1 JP1.1 | length 7.4
  Bottom Layer w1: JP1.1 138.579,52.6 138.579,59.044 D1.1
NetD2_2: D2.2 res1.2 | length 2.4
  Bottom Layer w1: D2.2 59.659,116.179 61.696,116.179 res1.2
NetF1_1: F1.1 P1.1 | length 5.2
  Bottom Layer w1: P1.1@125.103,52.101 125.503,52.101 125.903,52.101 126.353,52.101 127.084,52.101 127.769,52.786 129.769,52.786 F1.1
NetF1_2: F1.2 JP1.2 | length 3.2
  Bottom Layer w1: F1.2 135.171,53.086 135.806,52.451 JP1.2
NetJ1_1: J1.1 R1.2 | length 79.1
  Top Layer w1: v1(95.236,72.89) 94.234,73.891 94.234,102.616 103.505,111.887 119.888,111.887 v2(132.334,124.333)
  Bottom Layer w1: R1.2 93.349,72.894 95.231,72.894 v1(95.236,72.89)
NetP2_2: P2.2 R6.2 | length 11.3
  Bottom Layer w1: R6.2 128.27,113.973 128.52,113.723 130.371,113.723 P2.2
NetP2_3: P2.3 R5.2 | length 7.3
  Bottom Layer w1: R5.2 130.683,110.871 P2.3
NetQ4_1: Q4.1 Q5.1 R21.1 | length 31.8
  Top Layer w1: v1@123.952,103.378 123.952,103.124 125.215,101.861 v1(125.215,78.486)
  Bottom Layer w0.4: v1@123.698,103.305 123.698,100.796 125.114,99.38 Q5.1 ; v1@125.095,78.486 v1(125.215,78.486) 125.334,78.486 125.908,79.06 Q4.1
  other v1: 123.811,103.426
NetQ4_3: Q4.3 V1.1 | length 6.4
  Bottom Layer w1: 129.413,80.01 130.747,78.676 V1.1
NetQ5_3: Q5.3 V2.1 | length 7.7
  Bottom Layer w1: Q5.3 127.914,100.33 128.677,99.567 V2.1
NetR10_2: R10.2 V2.2 | length 7
  Bottom Layer w1: R10.2 128.302,95.599 135.223,95.599 V2.2
NetR11_2: R11.2 V2.3 | length 7
  Bottom Layer w1: R11.2 V2.3
pads on no net: 1.6 "Arduino Uno.0" "Arduino Uno.1" "Arduino Uno.3.3V" "Arduino Uno.AREF" "Arduino Uno.GND3" "Arduino Uno.IOREF" "Arduino Uno.NC" "Arduino Uno.RST" "Arduino Uno.SCL" "Arduino Uno.SDA" "Arduino Uno.Vin" M1.S M2.S M3.S M4.S P1.MH P3.2 P3.3 U1.9

## Keep-outs
Keep-Out Layer:
  the board outline again, w0.254

## Silkscreen, mask and mechanical layers (free items; w line width, h text height)
Top Overlay:
  lines w0.254: 57.15,118.237 79.248,118.237 79.629,117.856 79.629,113.919 77.597,111.887 65.913,111.887 64.389,113.411 64.389,118.11 ; 64.389,115.443 79.629,115.443 ; 71.501,111.887 71.628,112.014 71.628,118.237 ; 118.745,101.727 120.904,101.727 127.254,95.377 127.635,94.996 128.524,94.996 129.413,95.885 ; 118.872,98.933 121.031,98.933 128.143,91.821 128.651,91.821 129.286,92.456 ; 128.143,105.156 129.159,104.14 140.589,104.14 141.986,105.537 141.986,132.334 140.843,133.477 129.794,133.477 129.413,133.477 128.143,132.207 128.143,131.826 128.143,105.156
  text "DEC" at 85.725,139.86 h3
  text "INC" at 101.092,139.86 h3
  text "READ" at 56.261,139.827 h3
  text "WRITE" at 69.723,139.827 h3
  text "TESTER SENSOR HAL EEPROM" at 88.265,120.045 h2.5
  text "V : 1.0" at 102.362,116.749 h3
  text "ON" at 66.294,116.604 h1.52
  text "OFF" at 74.041,116.477 h1.52
  text "14021129" at 102.108,113.943 h2
  text "write" at 66.421,113.554 h1.52
  text "read" at 74.041,113.554 h1.52
  text "SCL" at 132.969,109.238 h1.52
  text "SDA" at 136.017,109.238 h1.52
  text "+5" at 139.7,109.238 h1.52
  text "GND" at 129.159,109.111 h1.52
  text "GND" at 129.685,99.822 h1.52 r270
  text "SCL" at 129.812,96.012 h1.52 r270
  text "SDA" at 129.812,92.964 h1.52 r270
  text "+5" at 129.812,89.281 h1.52 r270
  text "GND" at 129.812,78.994 h1.52 r270
  text "SCL" at 129.939,75.184 h1.52 r270
  text "SDA" at 129.939,72.136 h1.52 r270
  text "+5" at 129.939,68.453 h1.52 r270
  text "+5V DC" at 133.187,37.973 h3 r90

## Text inside footprints (layer, text, board x,y; h text height)
"Arduino Uno": Top Overlay "Arduino Datalogger Shield" at 93.594,56.787 h2 r90; Top Overlay "SDA" at 74.007,60.016 h1.21 r180; Top Overlay "SCL" at 73.994,57.487 h1.21 r180; Top Overlay "0" at 71.418,102.174 h1.21 r180; Top Overlay "1" at 71.015,99.634 h1.21 r180; Top Overlay "2" at 71.418,97.094 h1.21 r180; Top Overlay "3" at 71.418,94.554 h1.21 r180; Top Overlay "4" at 71.418,92.014 h1.21 r180; Top Overlay "5" at 71.418,89.474 h1.21 r180; Top Overlay "6" at 71.418,86.934 h1.21 r180; Top Overlay "7" at 71.418,84.394 h1.21 r180; Top Overlay "8" at 71.418,80.33 h1.21 r180; Top Overlay "9" at 71.418,77.79 h1.21 r180; Top Overlay "10" at 72.425,75.25 h1.21 r180; Top Overlay "11" at 72.022,72.71 h1.21 r180; Top Overlay "12" at 72.425,70.17 h1.21 r180; Top Overlay "13" at 72.425,67.63 h1.21 r180; Top Overlay "RX" at 76.2,102.489 h1.21 r180; Top Overlay "TX" at 76.175,99.949 h1.21 r180; Top Overlay "IOREF" at 115.189,69.342 h1.21 r180; Top Overlay "GND" at 115.316,78.257 h1.21 r90; Top Overlay "VIN" at 115.316,82.55 h1.21 r90; Top Overlay "A5" at 115.291,100.94 h0.86 r90; Top Overlay "A4" at 115.291,98.4 h0.86 r90; Top Overlay "A3" at 115.291,95.86 h0.86 r90; Top Overlay "A2" at 115.291,93.32 h0.86 r90; Top Overlay "A1" at 115.291,90.78 h0.86 r90; Top Overlay "3V3" at 115.316,74.295 h1.21 r180; Top Overlay "RESET" at 115.189,71.501 h1.21 r180; Top Overlay "GND" at 73.708,65.115 h1.21 r180; Top Overlay "AREF" at 74.891,62.473 h1.21 r180; Top Overlay "A0" at 115.291,88.24 h0.86 r90; Top Overlay "5V" at 115.316,75.184 h1.21 r90
BZ1: Top Overlay "+" at 46.558,126.631 h3
sw1: Top Overlay "4" at 56.871,127.457 h1.27 r90; Top Overlay "3" at 56.185,136.627 h1.27 r90; Top Overlay "2" at 65.1,127.203 h1.27 r90; Top Overlay "1" at 65.024,136.474 h1.27 r90
sw3: Top Overlay "4" at 85.7,127.457 h1.27 r90; Top Overlay "3" at 85.014,136.627 h1.27 r90; Top Overlay "2" at 93.929,127.203 h1.27 r90; Top Overlay "1" at 93.853,136.474 h1.27 r90
sw4: Top Overlay "4" at 107.213,136.583 h1.27 r270; Top Overlay "3" at 107.899,127.414 h1.27 r270; Top Overlay "2" at 98.984,136.837 h1.27 r270; Top Overlay "1" at 99.06,127.566 h1.27 r270
sw5: Top Overlay "4" at 71.095,127.457 h1.27 r90; Top Overlay "3" at 70.409,136.627 h1.27 r90; Top Overlay "2" at 79.324,127.203 h1.27 r90; Top Overlay "1" at 79.248,136.474 h1.27 r90
V1: Top Overlay "1" at 137.16,82.423 h3 r90
V2: Top Overlay "1" at 137.414,102.743 h3 r90